# EAGLE board Operacional (EAGLE 7.6.0)

Size 56.82 x 53.33 mm. Coordinates in mm from the lower left corner, seen from the top.
Outline: 0,0 56.82,0 56.82,53.33 0,53.33 0,0
Copper layers (1*16): Top 0.035mm / dielectric 1.5mm / Bottom 0.035mm
Design rules "default": minimum track width 10mil, minimum drill 24mil, track to track 8mil, track to pad 8mil, pad to pad 8mil, via to via 8mil, smd to smd 8mil, copper to edge 40mil, drill to drill 8mil, minimum pad ring 10mil, minimum via ring 8mil, stop-mask expansion 4mil, vias tented up to drill 0mil, thermal gap 10mil

## Footprints (pad centres in the part's own frame; a part is rotated, then mirrored left to right if it is on the bottom)
DC-POWER = drill 0.889 pad 2.54 octagon: + 0,2.54; - 0,-2.54
0207/10 = drill 0.813 octagon: 1 -5.08,0; 2 5.08,0
DIL08 = drill 0.813 pad 1.27: 1 -3.81,-3.81; 2 -1.27,-3.81; 3 1.27,-3.81; 4 3.81,-3.81; 5 3.81,3.81; 6 1.27,3.81; 7 -1.27,3.81; 8 -3.81,3.81

## Placement (x,y rotation side)
BAT1  [DC-POWER]  5,10.08 0 top
BAT2  [DC-POWER]  5,22.78 0 top
Meter1  [DC-POWER]  5,124.38 0 top  (outside the outline)
Meter2  [DC-POWER]  5,137.08 0 top  (outside the outline)
R1  50k‎Ω  [0207/10]  5,73.58 0 top  (outside the outline)
R2  10k‎Ω  [0207/10]  5,86.28 0 top  (outside the outline)
R3  5.1k‎Ω  [0207/10]  5,98.98 0 top  (outside the outline)
R4  20k‎Ω  [0207/10]  5,111.68 0 top  (outside the outline)
U1  [DIL08]  5,35.48 0 top
U2  [DIL08]  5,48.18 0 top
U3  [DIL08]  5,60.88 0 top  (outside the outline)

## Library data of the parts
BAT1 BAT2 Meter1 Meter2 R1-R4 U1-U3 = AUTODESK_CIRCUITS_BREADBOARD

## Nets
N$1: BAT1.- BAT2.+ Meter1.- Meter2.- R1.1 R2.1 U3.3
N$2: R3.1 U1.2 U1.6 U2.3
N$3: U1.5
N$4: U1.1
N$5: U1.8
N$6: U1.3
N$7: U3.5
N$8: BAT2.- U1.4 U2.4 U3.4
N$9: U3.1
N$10: U3.8
N$11: BAT1.+ U1.7 U2.7 U3.7
N$12: Meter2.+ R1.2 U2.6
N$13: U2.5
N$14: U2.1
N$15: R2.2 U2.2
N$16: R3.2 R4.1 U3.2
N$17: Meter1.+ R4.2 U3.6
N$18: U2.8

## Tracks (layer width: path | path; a pad name or v marks a point on that pad's centre or on a via)
N$1  (6 unrouted)
N$2  (3 unrouted)
N$8  (3 unrouted)
N$11  (3 unrouted)
N$12  (2 unrouted)
N$15  (1 unrouted)
N$16  (2 unrouted)
N$17  (2 unrouted)